# Altium PCB main-board.PcbDoc
Units mm, origin at the board's own origin, x right, y up, seen from the top; angles counter-clockwise.
Board outline 70 x 100 mm, 2 copper layers (Top Layer, Bottom Layer); 74 components, 49 nets, 338 pads, 78 vias.
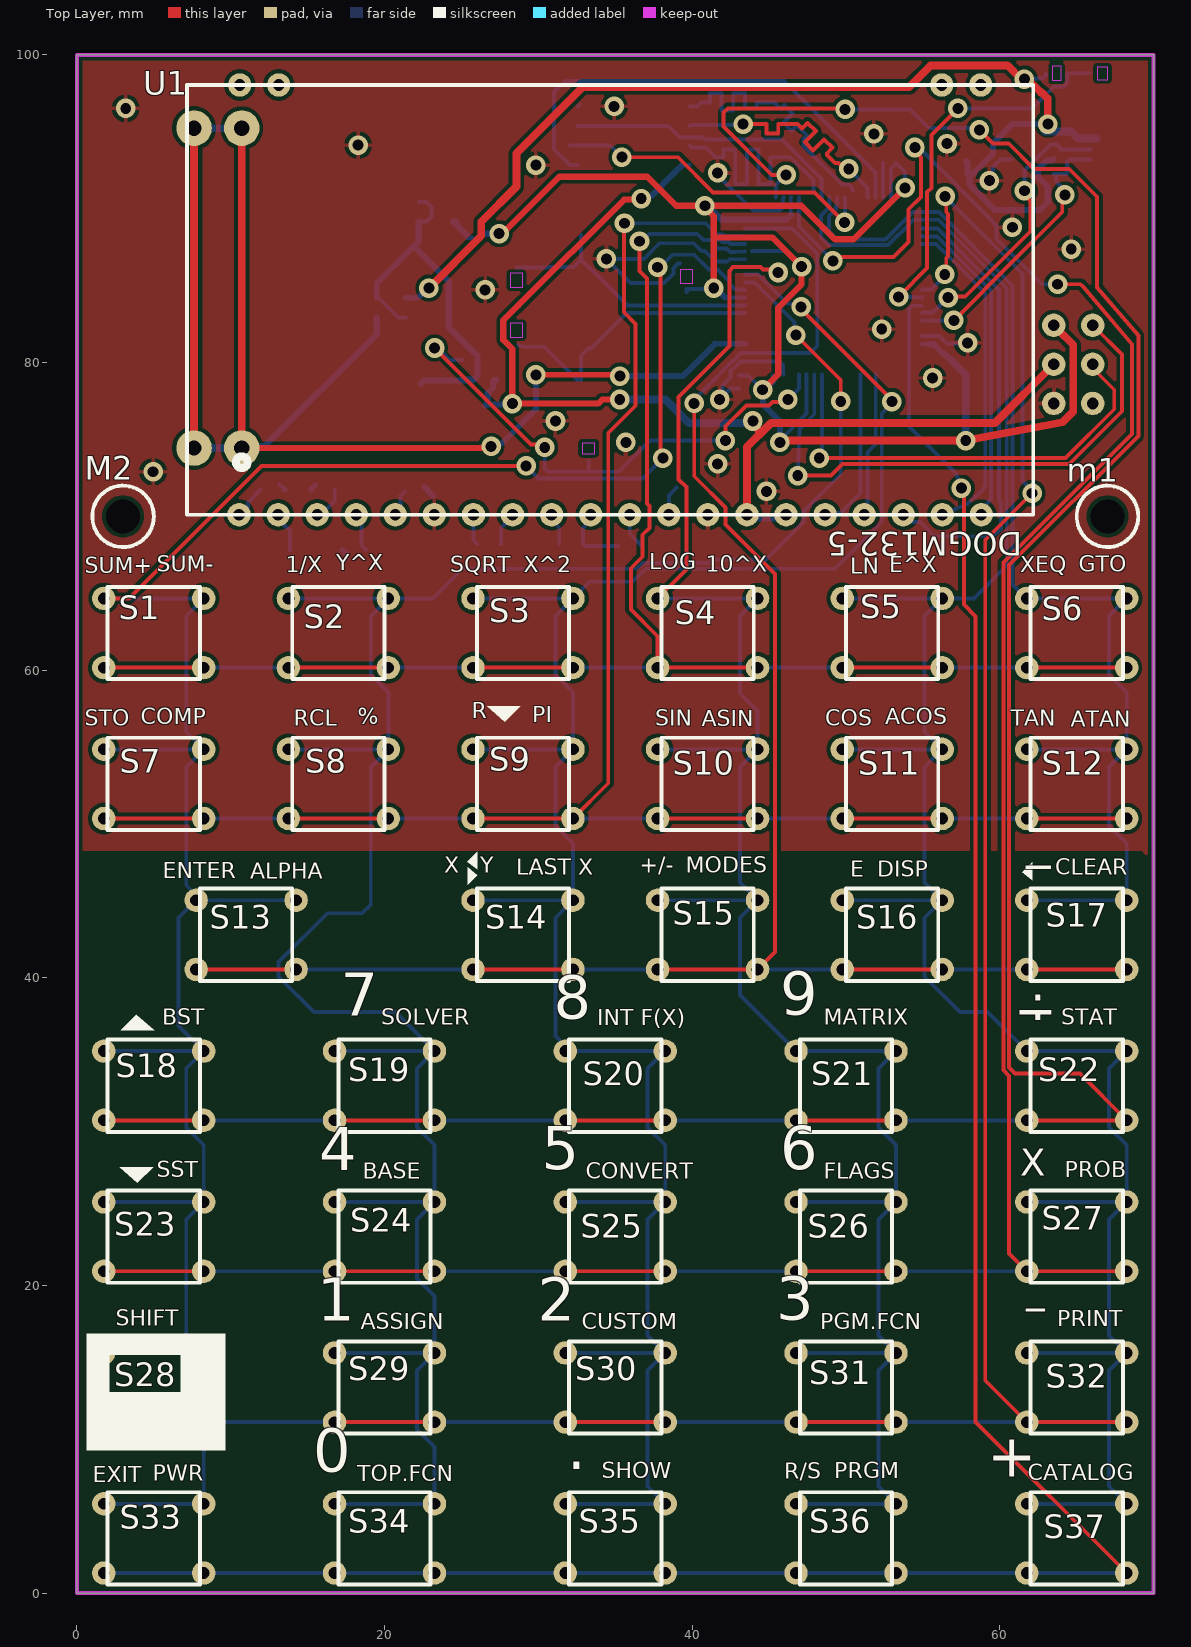
[diagram p0: Top Layer view]
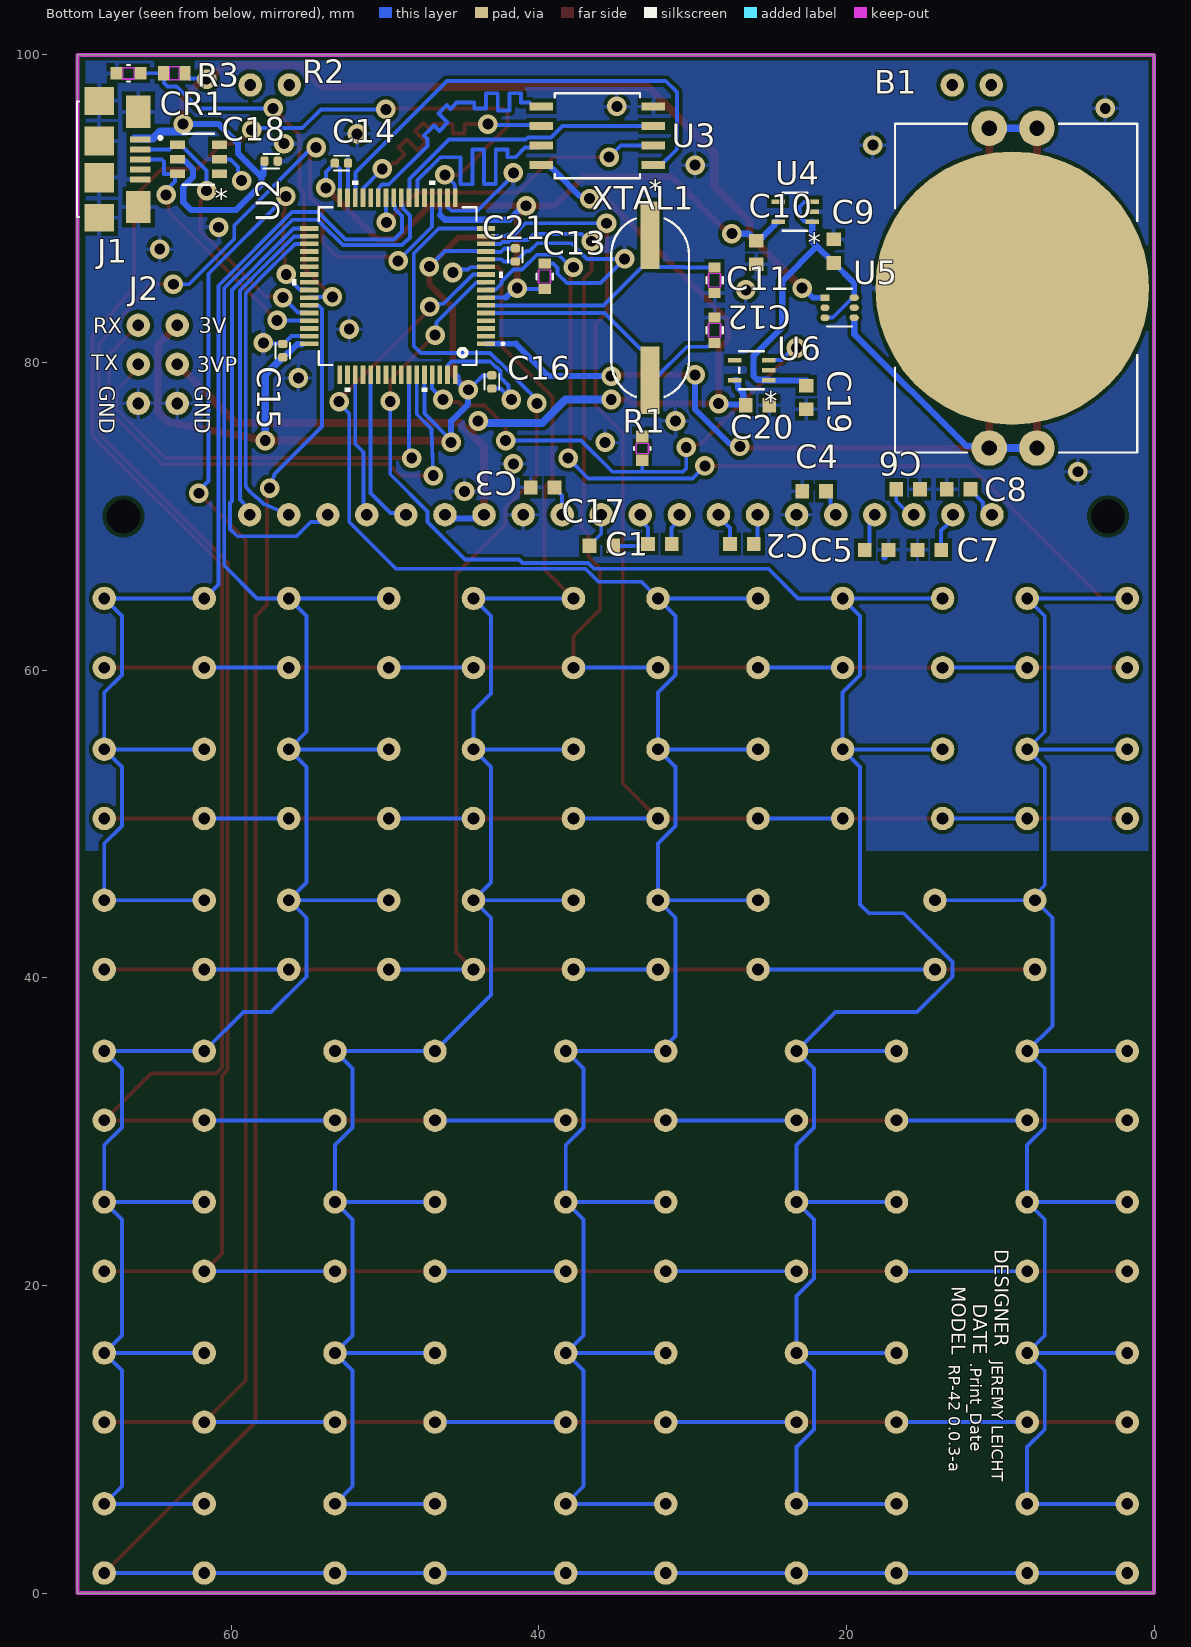
[diagram p1: Bottom Layer view, seen from below]

## Layer stack, top to bottom
Top Solder: solder mask 0.0102, Solder Resist, Dk 3.5
Top Layer: signal copper 0.0356
Dielectric 1: dielectric 0.32, FR-4, Dk 4.8
Bottom Layer: signal copper 0.0356
Bottom Solder: solder mask 0.0102, Solder Resist, Dk 3.5

## Board outline
0,0 70,0 70,100 0,100

## Design rules (kind name [scope] priority, off if disabled: settings)
Clearance [All] p1: gap=0.254 ignorepadtopadclearanceinfootprint=FALSE except(0.127: Arc-Arc Arc-Track Arc-SMDPad Track-Track Track-SMDPad SMDPad-SMDPad)
MatchedLengths [All] p1: tolerance=2.54 checknetsindiffpair=FALSE checkdiffpairvsdiffpair=TRUE checkxsignals=TRUE checkothers=TRUE
MinimumSolderMaskSliver [All] p1 off: minsoldermaskwidth=0.254
PolygonConnect [All] p1: connectstyle=Relief reliefconductorwidth=0.254 reliefentries=4 polygonreliefangle="90 Angle" airgapwidth=0.254
RoutingVias [All] p1: holewidth=0.711 width=1.27 viastyle="Through Hole" minholewidth=0.711 minwidth=1.27 maxholewidth=0.711 maxwidth=1.27
SilkToSilkClearance [All] p1 off: silktosilkclearance=0.254
SilkToSolderMaskClearance [IsPad] p1 off: minsilkscreentomaskgap=0.254 clearancetoexposedcopper=TRUE
SolderMaskExpansion [All] p1: expansion=0.102 istentingtop=FALSE
SupplyNets "Schematic Supply Nets_1" [InNet('3-5V')] p1: voltage=0.000
SupplyNets "Schematic Supply Nets_2" [InNet('3V PERPH')] p2: voltage=0.000
SupplyNets "Schematic Supply Nets_6" [InNet('3V')] p3: voltage=0.000
SupplyNets "Schematic Supply Nets_5" [InNet('5V USB')] p4: voltage=0.000
SupplyNets "Schematic Supply Nets_4" [InNet('GND')] p5: voltage=0.000
SupplyNets "Schematic Supply Nets" [InNet('VBAT')] p6: voltage=0.000
Width [All] p1: maxlimit=0.508 minlimit=0.254 preferedwidth=0.254 minimp=50.000000 maximp=50.000000 favimp=50.000000
27 further rules are at their usual default settings.

## Classes and differential pairs
net class ROW[0..6]: ROW0 ROW1 ROW2 ROW3 ROW4 ROW5 ROW6
net class COL[0..5]: COL0 COL1 COL2 COL3 COL4 COL5
component class screen: C1 C2 C3 C4 C5 C6 C7 C8 C17 U1
component class PSU: B1 C9 C10 C19 C20 R1 U4 U5 U6
component class mcu: C11 C12 C13 C14 C15 C16 C21 J2 R2 R3 U2 X1 X2 XTAL1
component class main-board: C18 CR1 J1 m1 m2 U3
component class keyboard: S1 S2 S3 S4 S5 S6 S7 S8 S9 S10 S11 S12 S13 S14 S15 S16 S17 S18 S19 S20 S21 S22 S23 S24 S25 S26 S27 S28 S29 S30 S31 S32 S33 S34 S35 S36 S37

## Components (designator, comment, footprint, x,y, rotation, side; value= is the part's Value field where it differs from the comment)
B1 "BAT-HLD-001-THM" BAT-HLD-001-THM_TEC 10.72,74.436 r90 bottom
C1 "1uF" CAPC1608X90N 32.131,68.199 r0 bottom
C2 "1uF" CAPC1608X90N 26.797,68.199 r0 bottom
C3 "1uF" CAPC1608X90N 39.751,71.882 r0 bottom
C4 "1uF" CAPC1608X90N 22.098,71.628 r0 bottom
C5 "1uF" CAPC1608X90N 18.034,67.818 r180 bottom
C6 "1uF" CAPC1608X90N 15.994,71.755 r180 bottom
C7 "1uF" CAPC1608X90N 14.613,67.818 r0 bottom
C8 "1uF" CAPC1608X90N 12.708,71.755 r0 bottom
C9 "1uF" CAPC1608X90N 20.828,87.241 r270 bottom
C10 "1uF" CAPC1608X90N 25.861,87.155 r90 bottom
C11 "20pF" CAP_CL10_SAM 28.575,85.344 r90 bottom
C12 "20pF" CAP_CL10_SAM 28.575,82.103 r270 bottom
C13 "100nF" CAPC1005X55N 41.529,86.995 r90 bottom
C14 "100nF" CAPC1005X55N 52.832,92.964 r0 bottom
C15 "100nF" CAPC1005X55N 56.642,80.772 r270 bottom
C16 "100nF" CAPC1005X55N 43.053,78.74 r90 bottom
C17 "1uF" CAPC1608X90N 35.941,68.08 r0 bottom
C18 "100nF" CAPC1005X55N 57.404,93.091 r180 bottom
C19 "1uF" CAPC1608X90N 22.606,77.724 r90 bottom
C20 "1uF" CAPC1608X90N 25.781,77.216 r0 bottom
C21 "10uF" CAP_CL10_SAM 39.624,85.598 r90 bottom
CR1 "USBLC6-4SC6" SOT23-6L_STM 62.135,93.218 r0 bottom
J1 "10118192-0002LF" AMPHENOL_10118192-0002LF 65.905,93.208 r270 bottom
J2 "bypass_conn" bypass_conn 66.04,82.423 r270 bottom
m1 "m2" m2 67,70 r0 top
M2 "m2" m2 3,70 r0 top (schematic designator m2)
R1 "100K" RC0603N_YAG 33.274,74.422 r270 bottom
R2 "33K" STA_RMCF0603_STP 63.691,98.806 r0 bottom
R3 "82K" RC0603N_YAG 66.675,98.806 r180 bottom
S1 "temp_switch" PCBComponent_1 5,62.416 r180 top
S2 "temp_switch" PCBComponent_1 17,62.416 r180 top
S3 "temp_switch" PCBComponent_1 29,62.416 r180 top
S4 "temp_switch" PCBComponent_1 41,62.416 r180 top
S5 "temp_switch" PCBComponent_1 53,62.416 r180 top
S6 "temp_switch" PCBComponent_1 65,62.416 r180 top
S7 "temp_switch" PCBComponent_1 5,52.606 r180 top
S8 "temp_switch" PCBComponent_1 17,52.606 r180 top
S9 "temp_switch" PCBComponent_1 29,52.606 r180 top
S10 "temp_switch" PCBComponent_1 41,52.606 r180 top
S11 "temp_switch" PCBComponent_1 53,52.606 r180 top
S12 "temp_switch" PCBComponent_1 65,52.606 r180 top
S13 "temp_switch" PCBComponent_1 11,42.796 r180 top
S14 "temp_switch" PCBComponent_1 29,42.796 r180 top
S15 "temp_switch" PCBComponent_1 41,42.796 r180 top
S16 "temp_switch" PCBComponent_1 53,42.796 r180 top
S17 "temp_switch" PCBComponent_1 65,42.796 r180 top
S18 "temp_switch" PCBComponent_1 5,32.986 r180 top
S19 "temp_switch" PCBComponent_1 20,32.986 r180 top
S20 "temp_switch" PCBComponent_1 35,32.986 r180 top
S21 "temp_switch" PCBComponent_1 50,32.986 r180 top
S22 "temp_switch" PCBComponent_1 65,32.986 r180 top
S23 "temp_switch" PCBComponent_1 5,23.176 r180 top
S24 "temp_switch" PCBComponent_1 20,23.176 r180 top
S25 "temp_switch" PCBComponent_1 35,23.176 r180 top
S26 "temp_switch" PCBComponent_1 50,23.176 r180 top
S27 "temp_switch" PCBComponent_1 65,23.176 r180 top
S28 "temp_switch" PCBComponent_1 5,13.366 r180 top
S29 "temp_switch" PCBComponent_1 20,13.366 r180 top
S30 "temp_switch" PCBComponent_1 35,13.366 r180 top
S31 "temp_switch" PCBComponent_1 50,13.366 r180 top
S32 "temp_switch" PCBComponent_1 65,13.366 r180 top
S33 "temp_switch" PCBComponent_1 5,3.556 r180 top
S34 "temp_switch" PCBComponent_1 20,3.556 r180 top
S35 "temp_switch" PCBComponent_1 35,3.556 r180 top
S36 "temp_switch" PCBComponent_1 50,3.556 r180 top
S37 "temp_switch" PCBComponent_1 65,3.556 r180 top
U1 "INTERFACE" INTERFACE 34.671,84.074 r180 top
U2 "STM32L475RCT3" LQFP64-10x10mm 49.184,84.967 r0 bottom
U3 "W25Q64JVSSIQ" SOIC-8_5P28X5P28_WIN 36.195,94.742 r0 bottom
U4 "MIC5365-3.0YC5-TR" SC-70_C5_MCH 23.336,89.804 r0 bottom
U5 "BAT54DW-7-F" SOT-363_DIO 20.447,83.566 r180 bottom
U6 "MIC5365-3.0YC5-TR" SC-70_C5_MCH 26.162,79.502 r0 bottom
XTAL1 "J49SMH-A-G-G-K-8M0" XTAL_J49SMH-A-G-G-K-8M0_JAU 32.766,83.566 r90 bottom

## Footprints (in the part's own frame and the unit in brackets; to place one, negate y for a bottom-side part, rotate by r counter-clockwise, add the part's x,y. Pads: shape width x height; smd on the part's side, far side on the other; paste and mask are expansions set on the pad)
AMPHENOL_10118192-0002LF [mm]
  rect 0.4x1.35 smd: 1(-1.3,0) 2(-0.65,0) 3(0,0) 4(0.65,0) 5(1.3,0)
  rect 2.1x1.6 smd: S1(-3.1,-0.125) S2(3.1,-0.125)
  rect 1.8x1.9 smd: S3(-3.8,-2.675) S6(3.8,-2.675)
  rect 1.9x1.9 smd: S4(-1.2,-2.675) S5(1.2,-2.675)
  silkscreen extent -3.75,-4.12 3.75,1.4, body extent -3.95,-4.82 3.95,0.28, height 2.7
BAT-HLD-001-THM_TEC [mil]
  round 91 / inner round 60 / far side round 91 hole 39 paste-99999 mask+0: 1(0,0) 2(0,-122.05) 3(818.9,0) 4(818.9,-122.05)
  round 700 smd paste-350 mask-350: 5(409.45,-59.06)
  silkscreen extent -11,-379 830,241
bypass_conn [mil]
  round 60 hole 30: 1(0,100) 2(100,100) 3(200,100) 4(0,0) 5(100,0) 6(200,0)
CAP_CL10_SAM [mm]
  rect 0.656x0.8 smd paste+0 mask+0: 1(-0.828,0) 2(0.828,0)
  Top Layer keep-out region: -0.449,-0.349 -0.449,0.349 0.449,0.349 0.449,-0.349
  Keep-Out Layer region: -0.449,-0.4 -0.449,0.4 0.449,0.4 0.449,-0.4
  silkscreen extent -0.19,-0.53 0.19,0.53, body extent -0.8,-0.4 0.8,0.4, height 0.9
CAPC1005X55N [mm]
  rrect53% 0.54x0.6 smd: 1(-0.43,0) 2(0.43,0)
  silkscreen extent -0.5,-0.48 0.5,0.48
CAPC1608X90N [mm]
  rect 0.89x0.93 smd: 1(-0.77,0) 2(0.77,0)
INTERFACE [mil]
  round 60 hole 30: 1(-948.23,-550) 2(-848.23,-550) 19(848.23,-550) 20(948.23,-550) 21(950,550) 22(850,550) 23(750,550) 24(650,550) 25(550,550) 26(450,550) 27(350,550) 28(250,550) 29(150,550) 30(50,550) 31(-50,550) 32(-150,550) 33(-250,550) 34(-350,550) 35(-450,550) 36(-550,550) 37(-650,550) 38(-750,550) 39(-850,550) 40(-950,550)
  silkscreen extent -1083,-550 1083,550
LQFP64-10x10mm [mil]
  rect 47x12 smd paste+0 mask+0: 1(-226.38,147.64) 2(-226.38,127.95) 3(-226.38,108.27) 4(-226.38,88.58) 5(-226.38,68.9) 6(-226.38,49.21) 7(-226.38,29.53) 8(-226.38,9.84) 9(-226.38,-9.84) 10(-226.38,-29.53) 11(-226.38,-49.21) 12(-226.38,-68.9) 13(-226.38,-88.58) 14(-226.38,-108.27) 15(-226.38,-127.95) 16(-226.38,-147.64) 33(226.38,-147.64) 34(226.38,-127.95) 35(226.38,-108.27) 36(226.38,-88.58) 37(226.38,-68.9) 38(226.38,-49.21) 39(226.38,-29.53) 40(226.38,-9.84) 41(226.38,9.84) 42(226.38,29.53) 43(226.38,49.21) 44(226.38,68.9) 45(226.38,88.58) 46(226.38,108.27) 47(226.38,127.95) 48(226.38,147.64)
  rect 12x47 smd paste+0 mask+0: 17(-147.64,-226.38) 18(-127.95,-226.38) 19(-108.27,-226.38) 20(-88.58,-226.38) 21(-68.9,-226.38) 22(-49.21,-226.38) 23(-29.53,-226.38) 24(-9.84,-226.38) 25(9.84,-226.38) 26(29.53,-226.38) 27(49.21,-226.38) 28(68.9,-226.38) 29(88.58,-226.38) 30(108.27,-226.38) 31(127.95,-226.38) 32(147.64,-226.38) 49(147.64,226.38) 50(127.95,226.38) 51(108.27,226.38) 52(88.58,226.38) 53(68.9,226.38) 54(49.21,226.38) 55(29.53,226.38) 56(9.84,226.38) 57(-9.84,226.38) 58(-29.53,226.38) 59(-49.21,226.38) 60(-68.9,226.38) 61(-88.58,226.38) 62(-108.27,226.38) 63(-127.95,226.38) 64(-147.64,226.38)
  silkscreen extent -273,-270 270,270, body extent -236,-236 236,236, height 63
m2 [mm]
  silkscreen extent -2,-2 2,2
PCBComponent_1 [mil]
  round 60 hole 30: 1(-127.95,88.58) 1(127.95,88.58) 2(-127.95,-88.58) 2(127.95,-88.58)
  silkscreen extent -118,-118 118,118
RC0603N_YAG [mil]
  rect 30x32 smd paste+0 mask+0: 1(-30.5,0) 2(30.5,0)
  Top Layer keep-out region: -13.5,-14 -13.5,14 13.5,14 13.5,-14
  Keep-Out Layer region: -13.5,-16 -13.5,16 13.5,16 13.5,-16
  silkscreen extent -3,-21 3,21, body extent -31,-16 31,16, height 28
SC-70_C5_MCH [mil]
  rect 34.5x12 smd paste+0 mask+0: 1(-43.75,25.59) 2(-43.75,0) 3(-43.75,-25.59) 4(43.75,-25.59) 5(43.75,25.59)
  silkscreen extent -32,-48 32,49, body extent -47,-44 47,44, height 43
SOIC-8_5P28X5P28_WIN [mil]
  rect 60x21 smd paste+0 mask+0: 1(-143.5,75) 2(-143.5,25) 3(-143.5,-25) 4(-143.5,-75) 5(143.5,-75) 6(143.5,-25) 7(143.5,25) 8(143.5,75)
  silkscreen extent -109,-109 109,109, body extent -159,-104 159,104, height 85
SOT23-6L_STM [mil]
  rect 38.5x22 smd paste+0 mask+0: 1(-53.75,37.4) 2(-53.75,0) 3(-53.75,-37.4) 4(53.75,-37.4) 5(53.75,0) 6(53.75,37.4)
  silkscreen extent -40,-65 40,65, body extent -59,-60 59,60, height 57
SOT-363_DIO [mm]
  rect 0.6x0.42 smd paste+0 mask+0: 1(-0.95,0.65)
  oval 0.6x0.42 smd paste+0 mask+0: 2(-0.95,0) 3(-0.95,-0.65) 4(0.95,-0.65) 5(0.95,0) 6(0.95,0.65)
  silkscreen extent -0.8,-1.23 0.8,1.23, body extent -0.9,-1.1 0.9,1.1, height 1
STA_RMCF0603_STP [mil]
  rect 28x37 smd paste+0 mask+0: 1(-27.5,0) 2(27.5,0)
  Top Layer keep-out region: -11.5,-16.5 -11.5,16.5 11.5,16.5 11.5,-16.5
  Keep-Out Layer region: -11.5,-18.5 -11.5,18.5 11.5,18.5 11.5,-18.5
  body extent -34,-19 34,19, height 22
XTAL_J49SMH-A-G-G-K-8M0_JAU [mil]
  rect 173x48 smd paste+0 mask+0: 1(-185.5,0) 2(185.5,0)
  silkscreen extent -228,-100 228,100, body extent -252,-94 252,94, height 159

## Part data
B1: "CR2032 Battery holder. 2.7V-3V.  /  / https://www.digikey.com/en/products/detail/te-connectivity-linx/BAT-HLD-001-THM/3044009", Mfr_Name="TE Connectivity", Supplier Part Number 1=BAT-HLD-001-THM-ND, RefDes=RefDes, Supplier 1=Digikey, Type=Type
C1 C2 C3 C4 C5 C6 C7 C8 C17 C20: library part CL10B105KP8NNNC, "CL10B105KP8NNNC", Package=None, Availability=Unavailable, MP=CL10B105KP8NNNC, Price=None
  C20: Supplier 1=Avnet, Supplier Part Number 1=CL10B105KP8NNNC
C9 C19: library part CL10B105KP8NNNC, "CL10B105KP8NNNC. / https://www.digikey.com/en/products/detail/samsung-electro-mechanics/CL10B105KP8NNNC/3887604?s=N4IgTCBcDaIMIBkCMAGAQqgrAaQAoA4A5YuEAXQF8g", Package=None, Availability=Unavailable, MP=CL10B105KP8NNNC, Price=None, Supplier 1=Avnet, Supplier Part Number 1=CL10B105KP8NNNC
C10: library part CL10B105KP8NNNC, "CL10B105KP8NNNC / https://www.digikey.com/en/products/detail/samsung-electro-mechanics/CL10B105KP8NNNC/3887604?s=N4IgTCBcDaIMIBkCMAGAQqgrAaQAoA4A5YuEAXQF8g", Package=None, Availability=Unavailable, MP=CL10B105KP8NNNC, Price=None, Supplier 1=Avnet, Supplier Part Number 1=CL10B105KP8NNNC
C11 C12: library part CL10C200JB8NNNC, "CL10C200JB8NNNC", Mfr_Name=Samsung
C13 C14 C15 C16 C18: library part CL05B104KP5NNNC, "0.1ÂµF Â±10% 10V Ceramic Capacitor X7R 0402 _1005 Metric_", Package="0402 Samsung", Availability=Unavailable, MF="Samsung Electro-Mechanics", MP=CL05B104KP5NNNC, Price=None, SnapEDA_Link=https://www.snapeda.com/parts/CL05B104KP5NNNC/Samsung%20Electro-Mechanics/view-part/1365387/?ref=snap
C21: library part CL10A106KQ8NNNL, "CL10A106KQ8NNNL", Mfr_Name=Samsung
CR1: "No Description Available", Mfr_Name=STMicroelectronics, RefDes=RefDes, Type=Type
J1: "Micro USB 2.0, Input Output Connectors, B TYPE RECEPTACLE without flange", Package=None, Check_prices=https://www.snapeda.com/parts/10118192-0002LF/Amphenol+FCI/view-part/?ref=eda, MF="Amphenol ICC", MP=10118192-0002LF, SnapEDA_Link=https://www.snapeda.com/parts/10118192-0002LF/Amphenol+FCI/view-part/?ref=snap
J2: "Bypass connector for power supply and backup chip programming"
R1: library part RC0603FR-07100KL, "RC0603FR-07100KL", Mfr_Name=Yageo
R2: library part RMCF0603FT33K0, "RMCF0603FT33K0", Mfr_Name="Stackpole International"
R3: library part RC0603FR-0782KL, "RC0603FR-0782KL", Mfr_Name=Yageo
U2: "STM32 - 256KB, 128KB RAM, USB OTG, QUAD SPI /  / https://www.st.com/en/microcontrollers-microprocessors/stm32l475rc.html#overview", Mfr_Name=STMicroelectronics, RefDes=RefDes, Type=Type
U3: "W25Q64JVSSIQ. 64MBit Quad-SPI flash", Mfr_Name=Winbond, RefDes=RefDes, Type=Type
U4 U6: "3V Linear Voltage Regulator. / https://www.digikey.com/en/products/detail/microchip-technology/MIC5365-3-0YC5-TR/1868092?s=N4IgTCBcDaILIEkDCBWAzANhQWjQOgAYBNVbAFQCUQBdAXyA", Mfr_Name=Microchip, Supplier Part Number 1=55AC2794, RefDes=RefDes, Supplier 1=Newark, Type=Type
U5: "2 Diode Array, 30V@100mA, Surface mount. Schottky. 6-TSSOP. / https://www.diodes.com/assets/Datasheets/BAT54DW.pdf", Mfr_Name="Diodes Inc", RefDes=RefDes, Supplier 1="Arrow Electronics", Supplier Part Number 1=BAT54DW-7-F, Type=Type
XTAL1: "No Description Available", Mfr_Name=Jauch

## Via types
v1: diameter 1.27, hole 0.711, Top Layer to Bottom Layer, 76 vias
v2: diameter 0/0 (per signal layer), hole 2.2, Top Layer to Bottom Layer, 2 vias

## Nets (pads, with @x,y where several pads share a name; then routed paths per layer and width w, separated by ;. In a path a pad name is that pad's centre, name@x,y a point inside that pad or via, vN(x,y) a via of type N, cw(c..) or ccw(c..) an arc to the next point about the centre after c; other vN are vias at no path point)
3-5V: C9.2 C19.2 U4.1 U4.3 U5.3 U5.6 U6.1 | length 25.5
  Bottom Layer w0.254: U5.6 19.593,84.216 20.893,82.916 U5.3 ; C9.2@20.808,86.471 C9.2 ; U4.1 22.25,89.179 22.73,89.179 23.044,89.494 23.044,90.114 22.73,90.429 22.25,90.429 U4.3 ; U6.1 U6.1@25.076,78.877
  Bottom Layer w0.381: U5.6 19.497,85.16 C9.2@20.808,86.471
  Bottom Layer w0.4: C9.2 21.915,87.558 ; U4.1 22.225,87.868 21.915,87.558 ; C19.2@22.352,78.613 22.578,78.839 U6.1@25.434,78.839 ; U6.1@25.076,78.877 25.791,78.877 26.035,79.121 26.035,80.44 24.178,82.297 24.178,85.296 21.916,87.558
3V: C10.2 C13.2 C14.2 C15.2 C16.2 C21.1 J2.1 U2.7 U2.13 U2.19 U2.32 U2.48 U2.60 U2.64 U4.5 | length 122.2
  Top Layer w0.254: v1(27.449,88.375) v1@27.669,88.375 ; v1(40.83,90.193) v1@41.105,90.193 ; v1@46.923,86.427 v1(47.117,86.233) ; J2.1 J2.1@63.754,82.169
  Top Layer w0.4: v1@27.669,88.375 31.369,92.075 37.084,92.075 38.966,90.193 v1(40.83,90.193) ; v1@40.894,90.022 41.402,89.514 41.402,88.138 ; v1@41.105,90.193 47.094,90.193 49.276,88.011 50.498,88.011 v1(53.84,91.353) ; v1(41.402,84.836) 41.402,88.138 ; v1(44.577,78.232) 45.593,79.248 45.593,83.566 47.117,85.09 v1(47.117,86.233) ; v1@46.923,86.427 45.212,88.138 41.402,88.138
  Top Layer w0.508: v1(45.707,74.805) 45.84,74.938 57.777,74.938 v1(57.785,74.93) 64.076,76.123 64.77,76.817 64.77,81.153 J2.1@63.754,82.169
  Bottom Layer w0.254: C10.2@25.47,88.132 25.655,88.132 C10.2@25.903,87.884 ; C21.1@39.624,84.768 39.624,84.582 39.81,84.768 41.334,84.768 v1(41.402,84.836) ; v1(40.83,90.193) v1@40.998,90.193 ; C13.2 42.241,87.425 42.475,87.192 42.763,87.192 42.964,87.199 U2.13 ; 42.148,84.217 U2.7 ; C16.2 43.639,79.17 44.261,78.548 v1@44.597,78.499 ; U2.13@43.878,87.217 43.904,87.242 46.108,87.242 v1(47.117,86.233) ; v1(45.707,74.805) 45.707,74.947 47.434,76.675 U2.60 ; 46.409,89.589 46.409,90.692 U2.19 ; U2.32 52.934,92.597 53.262,92.925 C14.2@53.262,92.943 ; C14.2 C14.2@53.262,92.943 ; v1(53.84,91.353) 53.84,92.386 53.425,92.801 53.404,92.801 C14.2@53.262,92.943 ; U2.48 55.353,81.217 55.379,81.192 U2.48@55.379,81.188 ; C15.2 56.663,80.342 56.805,80.2 C15.2@56.805,80.179
  Bottom Layer w0.4: U4.5 24.638,89.154 24.686,89.106 24.686,88.916 C10.2@25.47,88.132 ; C10.2 25.881,87.925 26.331,88.375 v1(27.449,88.375) ; v1@40.998,90.193 41.91,89.281 46.101,89.281 46.409,89.589 ; 41.91,84.455 42.148,84.217 ; v1(44.577,78.232) 44.594,78.215 44.594,77.303 45.707,76.191 v1@45.707,74.947 ; v1@44.577,78.36 44.834,78.36 45.294,78.82 U2.64@45.294,79.077 ; v1@44.933,78.353 44.979,78.398 v1@44.986,78.398 ; U2.48@55.379,81.188 55.707,81.188 56.29,80.605 56.349,80.605 56.542,80.412 56.572,80.412 C15.2
  Bottom Layer w0.508: C15.2@56.805,80.179 57.785,79.199 v1(57.785,74.93)
"3V PERPH": C20.2 J2.2 U1.34 U1.35 U3.8 U6.5 | length 73
  Top Layer w0.254: v1(28.307,77.329) v1@28.307,77.492 ; U1.34@42.974,69.864 43.153,70.042 U1.34@43.249,70.138 ; 44.323,75.276 44.323,75.438
  Top Layer w0.381: v1(28.307,77.329) 28.501,77.523 28.695,77.329 33.889,77.329 34.158,77.597 v1(35.293,77.597)
  Top Layer w0.4: v1@28.307,77.492 28.307,80.88 27.721,81.466 27.721,82.74 28.708,83.727 35.578,90.598 36.638,90.598 v1(36.691,90.65)
  Top Layer w0.508: U1.34 43.561,74.514 44.149,75.102 44.404,75.357 45.12,76.073 59.69,76.073 J2.2 ; v1(43.942,76.2) 43.942,75.994 44.323,75.613 44.323,75.438
  Bottom Layer w0.254: U3.8@39.345,92.837 U3.8
  Bottom Layer w0.381: C20.2 26.607,77.272 28.25,77.272 v1(28.307,77.329)
  Bottom Layer w0.4: C20.2 26.709,77.374 26.709,78.017 27.055,78.363 27.055,78.804 27.103,78.852 U6.5 ; v1(36.691,90.65) 36.857,90.817 37.324,90.817 38.866,92.359 U3.8@39.345,92.837 ; U1.34@43.89,69.85 U1.35@46.43,69.85
  Bottom Layer w0.508: v1(35.293,77.597) 38.261,77.597 39.786,76.073 43.815,76.073 v1(43.942,76.2)
"5V USB": C18.1 CR1.5 J1.1 R2.1 U5.1 | length 75.8
  Top Layer w0.508: v1(22.886,84.836) 26.289,88.239 26.289,89.154 28.575,91.44 28.575,93.599 32.893,97.917 54.102,97.917 55.499,99.314 60.508,99.314 61.397,98.425 61.801,98.425 62.665,97.561 62.713,97.561 63.119,97.155 v1(63.119,95.504)
  Bottom Layer w0.254: v1(61.595,98.425) 61.633,98.463 62.763,98.463 62.992,98.692 R2.1 ; v1@63.017,95.606 v1(63.119,95.504)
  Bottom Layer w0.381: U5.1 22.17,84.216 22.79,84.836 v1(22.886,84.836)
  Bottom Layer w0.4: C18.1 57.904,93.021 57.904,92.21 58.039,92.075 ; v1(63.119,95.504) 60.809,95.504 59.563,94.258 59.563,93.599 58.039,92.075 ; CR1.5 63.421,93.139 63.04,93.139 62.484,92.583 62.484,92.052 63.119,91.417 63.119,90.424 62.611,89.916 59.69,89.916 58.039,91.567 58.039,92.075
  Bottom Layer w0.508: v1@62.928,95.016 64.633,95.016 64.899,94.75 65.087,94.562 J1.1@66.294,94.562
C1N: C1.2 C17.1 U1.30 | length 4.4
  Bottom Layer w0.254: U1.30 33.401,69.76 32.901,69.26 C1.2 33.028,68.072 35.163,68.072 C17.1
C1P: C1.1 U1.29 | length 2.1
  Bottom Layer w0.254: U1.29 30.861,69.76 31.361,69.26 C1.1
C2N: C2.1 U1.27 | length 2
  Bottom Layer w0.254: U1.27 25.781,68.445 C2.1
C2P: C2.2 U1.28 | length 2.2
  Bottom Layer w0.254: C2.2 27.567,69.242 28.321,69.996 U1.28
C3P: C17.2 U1.31 | length 2.3
  Bottom Layer w0.254: U1.31 35.941,68.87 36.711,68.1 C17.2
COL0: S1.2 S7.2 S13.2 S18.2 S23.2 S28.2 S33.2 U2.8 | length 170.4
  Top Layer w0.254: S1.2@1.75,64.666 3.386,64.666 11.999,73.279 v1(29.21,73.279) ; v1(37.759,86.193) 37.929,86.023 37.929,73.958 v1(38.1,73.787)
  Bottom Layer w0.254: S33.2@1.75,5.806 8.25,5.806 8.25,9.5 7.107,10.643 7.107,14.473 S28.2@8.25,15.616 ; S28.2@1.75,15.616 S28.2@8.25,15.616 ; S23.2@1.75,25.426 S23.2@8.25,25.426 ; S18.2@1.75,35.236 S18.2@8.25,35.236 ; S7.2@1.75,54.856 S7.2@8.25,54.856 ; S1.2@1.75,64.666 8.25,64.666 7.107,63.523 7.107,55.999 S7.2@8.25,54.856 ; S13.2@14.25,45.046 S13.2@7.75,45.046 ; v1(29.21,73.279) 30.015,72.474 36.787,72.474 v1(38.1,73.787) ; v1(37.759,86.193) 37.911,86.193 38.726,87.008 40.129,87.008 41.096,86.041 41.634,86.041 42.418,85.257 42.418,85.124 42.8,84.742 43.409,84.742 U2.8 ; S13.2@7.75,45.046 6.607,43.903 6.607,36.879 S18.2@8.25,35.236 ; S13.2@7.75,45.046 7.75,45.376 7.107,46.019 7.107,53.713 S7.2@8.25,54.856 ; S28.2@8.25,15.616 7.107,16.759 7.107,24.283 S23.2@8.25,25.426 ; S23.2@8.25,25.426 8.25,29.12 7.107,30.263 7.107,34.093 S18.2@8.25,35.236
COL1: S2.2 S8.2 S19.2 S24.2 S29.2 S34.2 U2.9 | length 161.8
  Top Layer w0.254: v1(46.736,81.788) 49.657,78.867 v1(49.657,77.47)
  Bottom Layer w0.254: S8.2@13.75,54.856 S8.2@20.25,54.856 ; S2.2@13.75,64.666 S2.2@20.25,64.666 ; S34.2@16.75,5.806 23.25,5.806 23.25,9.5 22.107,10.643 22.107,14.473 S29.2@23.25,15.616 ; S29.2@16.75,15.616 S29.2@23.25,15.616 ; S24.2@16.75,25.426 S24.2@23.25,25.426 ; S19.2@16.75,35.236 S19.2@23.25,35.236 ; U2.9 43.459,85.192 44.068,85.192 46.639,82.62 46.639,81.885 v1(46.736,81.788) ; v1(49.657,77.47) 49.657,72.736 47.244,70.323 47.244,69.631 44.796,67.183 41.275,67.183 41.064,66.972 36.795,66.972 36.414,66.591 25.066,66.591 23.141,64.666 S2.2@20.25,64.666 ; S8.2@20.25,54.856 19.107,53.713 19.107,44.761 18.542,44.196 16.284,44.196 13.107,41.019 13.107,40.073 15.404,37.776 20.71,37.776 S19.2@23.25,35.236 ; S8.2@20.25,54.856 20.25,58.55 19.107,59.693 19.107,63.523 S2.2@20.25,64.666 ; S29.2@23.25,15.616 23.25,19.31 22.107,20.453 22.107,24.283 S24.2@23.25,25.426 ; S24.2@23.25,25.426 23.25,29.12 22.107,30.263 22.107,34.093 S19.2@23.25,35.236
COL2: S3.2 S9.2 S14.2 S20.2 S25.2 S30.2 S35.2 U2.10 | length 153.6
  Top Layer w0.254: v1(47.08,83.616) 47.08,83.483 52.839,77.724 52.959,77.724 v1@52.959,77.089
  Bottom Layer w0.254: S14.2@25.75,45.046 S14.2@32.25,45.046 ; S9.2@25.75,54.856 S9.2@32.25,54.856 ; S3.2@25.75,64.666 S3.2@32.25,64.666 ; S35.2@31.75,5.806 38.25,5.806 37.107,6.949 37.107,14.473 S30.2@38.25,15.616 ; S30.2@31.75,15.616 S30.2@38.25,15.616 ; S25.2@31.75,25.426 S25.2@38.25,25.426 ; U2.10 44.291,85.717 46.188,83.82 46.423,83.82 46.433,83.811 46.886,83.811 v1(47.08,83.616) ; v1(52.984,77.46) 52.984,77.343 52.324,76.683 52.324,69.631 49.284,66.591 36.953,66.591 36.112,65.75 33.334,65.75 S3.2@32.25,64.666 ; S14.2@32.25,45.046 31.107,43.903 31.107,36.209 31.75,35.566 31.75,35.236 38.25,35.236 37.107,34.093 37.107,30.263 38.25,29.12 S25.2@38.25,25.426 ; S14.2@32.25,45.046 32.25,48.74 31.107,49.883 31.107,53.713 S9.2@32.25,54.856 ; S9.2@32.25,54.856 32.25,58.55 31.107,59.693 31.107,63.523 S3.2@32.25,64.666 ; S30.2@38.25,15.616 37.107,16.759 37.107,24.283 S25.2@38.25,25.426
COL3: S4.2 S10.2 S15.2 S21.2 S26.2 S31.2 S36.2 U2.11 | length 141.1
  Top Layer w0.254: S4.2@37.306,64.222 39.624,66.54 39.624,71.898 39.116,72.406 39.116,77.764 42.418,81.066 42.418,85.957 42.662,86.201 44.45,86.201 44.605,86.046 45.399,86.046 v1(45.593,85.852)
  Bottom Layer w0.254: S15.2@37.75,45.046 S15.2@44.25,45.046 ; S10.2@37.75,54.856 S10.2@44.25,54.856 ; S4.2@37.75,64.666 44.25,64.666 43.107,63.523 43.107,58.491 44.25,57.348 S10.2@44.25,54.856 ; U2.11 43.459,86.192 44.45,86.192 44.595,86.046 45.399,86.046 v1(45.593,85.852) ; S36.2@46.75,5.806 53.25,5.806 52.107,6.949 52.107,14.473 S31.2@53.25,15.616 ; S31.2@46.75,15.616 S31.2@53.25,15.616 ; S26.2@46.75,25.426 S26.2@53.25,25.426 ; S15.2@44.25,45.046 43.107,43.903 43.107,38.879 46.75,35.236 53.25,35.236 52.107,34.093 52.107,30.263 53.25,29.12 S26.2@53.25,25.426 ; S15.2@44.25,45.046 43.107,46.189 43.107,53.713 S10.2@44.25,54.856 ; S31.2@53.25,15.616 52.107,16.759 52.107,24.283 S26.2@53.25,25.426
COL4: S5.2 S11.2 S16.2 S22.2 S27.2 S32.2 S37.2 U2.24 | length 154.1
  Bottom Layer w0.254: U2.24 48.934,90.273 48.84,90.179 48.84,90.015 48.387,89.562 48.387,88.129 48.886,87.63 52.739,87.63 54.083,88.975 54.232,89.123 54.39,89.281 56.005,89.281 60.452,84.834 60.452,66.802 58.316,64.666 S5.2@56.25,64.666 ; S16.2@49.75,45.046 S16.2@56.25,45.046 ; S11.2@49.75,54.856 S11.2@56.25,54.856 ; S5.2@49.75,64.666 S5.2@56.25,64.666 ; S37.2@61.75,5.806 68.25,5.806 67.107,6.949 67.107,14.473 S32.2@68.25,15.616 ; S32.2@61.75,15.616 S32.2@68.25,15.616 ; S27.2@61.75,25.426 S27.2@68.25,25.426 ; S16.2@56.25,45.046 55.107,43.903 55.107,40.073 57.404,37.776 59.21,37.776 61.75,35.236 68.25,35.236 67.107,34.093 67.107,30.263 68.25,29.12 S27.2@68.25,25.426 ; S16.2@56.25,45.046 55.107,46.189 55.107,53.713 S11.2@56.25,54.856 ; S11.2@56.25,54.856 55.107,55.999 55.107,63.523 S5.2@56.25,64.666 ; S32.2@68.25,15.616 67.107,16.759 67.107,24.283 S27.2@68.25,25.426
COL5: S6.2 S12.2 S17.2 U2.25 | length 79
  Bottom Layer w0.254: U2.25 49.434,90.273 49.34,90.179 49.34,89.976 48.895,89.531 48.895,88.519 49.403,88.011 52.581,88.011 54.359,89.789 56.036,89.789 60.833,84.992 60.833,65.583 61.75,64.666 68.25,64.666 67.107,63.523 67.107,59.693 68.25,58.55 S12.2@68.25,54.856 ; S17.2@61.75,45.046 68.25,45.046 68.25,48.74 67.107,49.883 67.107,53.713 S12.2@68.25,54.856 ; S12.2@61.75,54.856 S12.2@68.25,54.856
D+: CR1.6 J1.3 U2.45 | length 17.5
  Top Layer w0.254: v1(57.016,82.745) 60.902,86.632 63.277,89.007 64.061,89.79 64.061,90.275
  Bottom Layer w0.254: U2.45 54.948,82.731 57.002,82.731 v1(57.016,82.745) ; v1(64.227,90.897) 64.227,91.172 63.642,91.756 63.642,92.126 CR1.6 63.71,92.268 64.37,92.268 64.37,93.059 64.519,93.208 J1.3
D-: CR1.4 J1.2 U2.44 | length 18.5
  Top Layer w0.254: v1(56.64,84.222) 56.712,84.294 57.751,84.294 61.991,88.534 61.991,90.512 61.602,90.9 v1(61.602,91.169)
  Bottom Layer w0.254: U2.44 54.959,83.242 55.66,83.242 v1(56.64,84.222) ; v1(61.602,91.169) 61.602,92.48 63.29,94.168 63.71,94.168 64.02,93.858 J1.2
FLASH_CLK: U2.29 U3.6 | length 18.4
  Top Layer w0.254: v1(43.307,95.504) 43.942,95.504 44.831,95.504 44.831,94.876 45.593,94.876 45.593,95.504 46.479,95.504 46.863,95.504 47.053,95.313 47.143,95.224 47.503,95.583 48.041,95.044 47.323,94.326 47.862,93.787 48.58,94.505 49.119,93.966 48.76,93.607 48.76,93.488 49.283,92.964 49.523,92.964 49.903,92.584 v1(50.178,92.584)
  Bottom Layer w0.254: U3.6 39.903,95.441 43.243,95.441 v1(43.307,95.504) ; v1(50.178,92.584) 51.409,91.353 51.409,90.742 U2.29
FLASH_IO0: U2.27 U3.5 | length 19.8
  Bottom Layer w0.254: U3.5 40.335,96.647 40.589,96.901 41.021,96.901 41.148,96.901 41.148,97.506 41.91,97.506 41.91,96.393 42.672,96.393 42.672,97.506 43.434,97.506 43.434,96.52 44.196,96.52 44.196,96.901 45.021,96.901 45.339,96.901 45.657,96.584 45.746,96.494 45.987,96.734 46.525,96.195 45.926,95.596 46.465,95.057 46.824,95.416 47.015,95.225 47.482,94.758 47.244,94.521 47.244,94.081 49.757,91.568 50.192,91.568 50.409,91.351 50.409,91.187 50.429,91.166 U2.27@50.434,91.166
FLASH_IO1: U2.26 U3.2 | length 21.6
  Top Layer w0.254: v1(35.433,93.348) 39.073,93.348 41.362,91.059 47.962,91.059 v1(49.911,89.11)
  Bottom Layer w0.254: U3.2@32.055,94.107 U3.2 34.671,94.107 v1@35.433,93.345 ; U2.26@49.909,90.742 49.923,90.729 49.923,89.121 v1(49.911,89.11)
FLASH_IO2: U2.23 U3.3 | length 18.5
  Bottom Layer w0.254: U3.3 33.528,95.377 35.644,95.377 38.452,95.377 39.201,94.628 40.707,94.628 40.847,94.488 45.847,94.488 48.409,91.926 48.409,90.742 U2.23
FLASH_IO3: U2.22 U3.7 | length 18.7
  Bottom Layer w0.254: U3.7 39.967,93.98 40.894,93.98 41.529,93.345 41.91,93.345 42.037,93.345 42.037,93.853 42.799,93.853 42.799,91.598 43.561,91.598 43.561,93.853 44.323,93.853 44.323,91.588 45.085,91.588 45.085,93.345 45.72,93.345 46.396,93.345 47.879,91.862 U2.22@47.879,91.186
FLASH_NCS: U2.30 U3.1 | length 31
  Bottom Layer w0.254: U3.1 32.055,92.837 31.026,93.866 31.026,97.574 31.75,98.298 45.974,98.298 51.909,92.363 51.909,90.742 U2.30
GND: B1.5 C3.2 C4.2 C5.2 C6.2 C7.2 C8.2 C9.1 C10.1 C11.1 C12.1 C13.1 C14.1 C15.1 C16.1 C18.2 C19.1 C20.1 C21.2 CR1.2 J1.5 J1.S1 J1.S2 J1.S3 J1.S4 J1.S5 J1.S6 J2.3 J2.6 R1.1 R3.1 U1.26 U1.33 U2.12 U2.18 U2.31 U2.47 U2.63 U3.4 U4.2 U6.2 | length 41.6
  Top Layer w0.254: U1.26 U1.26@23.46,70.323
  Bottom Layer w0.254: C8.2@13.182,72.071 C8.2@13.478,71.775 ; v1@18.288,93.904 v1@18.288,94.361 ; U1.26 23.484,69.861 U1.26@23.484,69.764 ; U3.4 U3.4@32.69,96.787 ; 39.224,86.428 39.066,86.428 38.775,86.137 38.775,85.772 38.18,85.177 35.981,85.177 v1(34.417,86.741) 36.87,86.741 37.886,87.757 40.092,87.757 40.6,87.249 40.815,87.249 41.499,86.565 C13.1 42.269,86.565 42.421,86.717 U2.12 ; v1(41.656,92.329) 41.656,92.202 43.992,89.866 45.692,89.866 45.909,90.083 45.909,90.692 U2.18 ; v1(41.783,77.597) v1@41.977,77.791 ; C16.1 42.496,78.31 v1@41.977,77.791 ; U2.63 45.909,79.242 45.909,79.851 45.692,80.068 43.154,80.068 42.781,79.694 42.732,79.694 42.499,79.461 42.499,79.025 41.977,78.503 v1@41.977,77.791 ; C14.1 52.418,92.948 52.418,90.733 U2.31 ; U2.47 56.088,81.717 56.603,81.202 C15.1 56.681,81.241 57.873,81.241 v1(57.912,81.28) ; v1(59.325,91.821) 59.325,92.096 59.563,92.334 59.563,92.71 60.048,93.195 60.747,93.195 CR1.2
  Bottom Layer w0.381: C8.2@13.478,71.775 C8.2@13.498,71.755 ; C6.2 C6.2@15.479,72.01 ; C5.2 17.518,67.563 17.518,67.318 ; C4.2@22.594,71.903 22.614,71.903 C4.2@22.868,71.648 ; C4.2@22.867,71.609 23.122,71.353 C4.2@23.14,71.353
  other v1: 44.831,71.628 4.953,72.898 41.656,73.406 35.687,74.803 31.115,76.2 55.626,78.994 52.324,82.169 26.54,84.726 64.643,87.376 60.813,88.793 29.845,92.837 18.288,94.132 56.566,94.234 51.816,94.869 3.175,96.52 34.925,96.647
LCD_A0: U1.38 U2.33 | length 29
  Bottom Layer w0.254: U1.38@54.05,69.85 54.269,69.631 54.829,69.631 55.753,68.707 59.603,68.707 60.071,69.175 60.071,70.866 59.944,70.993 59.944,84.709 58.198,86.455 58.198,86.467 57.156,87.508 57.145,87.508 55.936,88.717 U2.33
LCD_CS: U1.40 U2.34 | length 20.9
  Bottom Layer w0.254: U2.34 54.959,88.192 55.923,88.192 56.987,87.127 56.999,87.127 57.817,86.309 57.817,86.297 59.436,84.678 59.436,71.083 59.044,70.691 U1.40@59.044,69.936
LCD_RES: U1.39 U2.35 | length 21.4
  Bottom Layer w0.254: U2.35 55.858,87.717 56.829,86.746 56.841,86.746 57.436,86.151 57.436,86.139 59.055,84.52 59.055,71.969 58.812,71.639 58.724,71.551 58.165,71.054 ccw(c58.801,70.104) 57.906,70.815 U1.39
LCD_SCL: U1.37 U2.51 | length 9.6
  Bottom Layer w0.254: U1.37@51.51,69.85 51.409,69.951 51.409,74.17 51.934,74.695 U2.51
LCD_SI: U1.36 U2.53 | length 10.6
  Bottom Layer w0.254: U1.36 48.746,70.209 49.635,70.209 50.934,71.508 U2.53
NetC11_2: C11.2 U2.6 XTAL1.2 | length 17.8
  Bottom Layer w0.254: C11.2@28.575,86.174 30.549,86.174 30.582,86.208 32.283,86.208 32.766,86.69 XTAL1.2 ; XTAL1.2@32.846,86.61 33.249,86.208 33.299,86.208 35.79,83.717 U2.6
NetC12_2: C12.2 U2.5 XTAL1.1 | length 18.2
  Bottom Layer w0.254: C12.2@28.702,81.153 28.78,81.075 28.951,81.075 28.997,81.028 30.363,81.028 XTAL1.1@32.537,78.854 ; XTAL1.1 32.766,80.442 33.249,80.924 33.426,80.924 35.719,83.217 U2.5
PWR_PERPH: R1.2 U2.61 U6.3 | length 33.8
  Top Layer w0.254: v1(23.253,80.945) 29.518,74.68 30.222,74.68 v1(30.416,74.485) ; v1@42.164,75.184 42.164,75.859 43.521,77.216 44.998,77.216 45.212,77.43 46.061,77.43 v1(46.228,77.597)
  Bottom Layer w0.254: v1(23.253,80.945) 23.438,80.945 24.232,80.152 U6.3 ; v1(30.416,74.485) 30.416,73.11 30.629,72.898 33.274,72.898 ; R1.2 33.274,72.898 ; v1(42.164,74.93) 37.251,74.93 35.219,72.898 33.274,72.898 ; v1@46.482,77.851 46.934,78.303 U2.61
ROW0: S1.1 S2.1 S3.1 S4.1 S5.1 S6.1 U2.14 | length 103
  Top Layer w0.254: S1.1@1.75,60.166 S1.1@8.25,60.166 ; S2.1@13.75,60.166 S2.1@20.25,60.166 ; S3.1@25.75,60.166 S3.1@32.25,60.166 ; v1(36.576,87.884) 36.576,85.939 37.066,85.45 37.066,70.822 37.214,70.674 37.214,69.253 36.767,68.805 36.767,67.373 36.017,66.624 36.017,63.94 37.75,62.207 37.75,60.166 S4.1@44.25,60.166 ; S5.1@49.75,60.166 S5.1@56.25,60.166 ; S6.1@61.75,60.166 S6.1@68.25,60.166
  Bottom Layer w0.254: S1.1@8.25,60.166 S2.1@13.75,60.166 ; S2.1@20.25,60.166 S3.1@25.75,60.166 ; S3.1@32.25,60.166 S4.1@37.75,60.166 ; v1(36.576,87.884) 36.757,87.884 37.233,88.36 40.331,88.36 40.736,87.955 41.844,87.955 41.963,87.836 42.369,87.836 42.488,87.717 U2.14 ; S4.1@44.25,60.166 S5.1@49.75,60.166 ; S5.1@56.25,60.166 S6.1@61.75,60.166
ROW1: S7.1 S8.1 S9.1 S10.1 S11.1 S12.1 U2.15 | length 115.4
  Top Layer w0.254: S7.1@1.75,50.356 S7.1@8.25,50.356 ; S8.1@13.75,50.356 S8.1@20.25,50.356 ; S9.1@25.75,50.356 32.25,50.356 34.544,52.65 34.544,75.411 36.322,77.189 36.322,82.506 35.56,83.268 35.56,89.014 v1(35.6,89.055) ; S10.1@37.75,50.356 S10.1@44.25,50.356 ; S11.1@49.75,50.356 S11.1@56.25,50.356 ; S12.1@61.75,50.356 S12.1@68.25,50.356
  Bottom Layer w0.254: S7.1@8.25,50.356 S8.1@13.75,50.356 ; S8.1@20.25,50.356 S9.1@25.75,50.356 ; S9.1@32.25,50.356 S10.1@37.75,50.356 ; v1(35.6,89.055) 40.866,89.055 41.585,88.336 42.002,88.336 42.121,88.217 U2.15 ; S10.1@44.25,50.356 S11.1@49.75,50.356 ; S11.1@56.25,50.356 S12.1@61.75,50.356
ROW2: S13.1 S14.1 S15.1 S16.1 S17.1 U2.16 | length 121.1
  Top Layer w0.254: S13.1@7.75,40.546 S13.1@14.25,40.546 ; S14.1@25.75,40.546 S14.1@32.25,40.546 ; S15.1@37.75,40.546 44.25,40.546 45.393,41.689 45.393,66.24 42.164,69.469 42.164,70.577 40.132,72.609 v1(40.132,77.343) ; S16.1@49.75,40.546 S16.1@56.25,40.546 ; S17.1@61.75,40.546 S17.1@68.25,40.546
  Bottom Layer w0.254: S13.1@14.25,40.546 S14.1@25.75,40.546 ; S14.1@32.25,40.546 S15.1@37.75,40.546 ; v1(40.132,77.343) 40.132,77.584 41.148,78.6 42.118,79.57 42.118,79.619 42.574,80.075 42.623,80.075 43.166,80.618 47.671,80.618 48.133,81.08 48.133,87.091 46.507,88.717 U2.16 ; S15.1@44.25,40.546 S16.1@49.75,40.546 ; S16.1@56.25,40.546 S17.1@61.75,40.546
ROW3: S18.1 S19.1 S20.1 S21.1 S22.1 U2.17 | length 171.5
  Top Layer w0.254: S18.1@1.75,30.736 S18.1@8.25,30.736 ; S19.1@16.75,30.736 S19.1@23.25,30.736 ; S20.1@31.75,30.736 S20.1@38.25,30.736 ; v1(46.101,92.203) 45.171,92.203 42.037,95.337 42.037,96.244 42.313,96.52 49.888,96.52 v1(49.949,96.459) ; S21.1@46.75,30.736 S21.1@53.25,30.736 ; v1(58.674,95.123) 59.563,94.234 60.579,94.234 62.23,92.583 64.516,92.583 66.255,90.844 66.33,90.769 66.33,84.879 69.014,81.751 69.014,75.237 60.607,66.83 60.607,34.163 60.988,33.782 65.204,33.782 68.25,30.736 S22.1@61.75,30.736
  Bottom Layer w0.254: S18.1@8.25,30.736 S19.1@16.75,30.736 ; S19.1@23.25,30.736 S20.1@31.75,30.736 ; S20.1@38.25,30.736 S21.1@46.75,30.736 ; U2.17 45.459,90.742 45.459,91.424 45.466,91.431 45.466,91.567 v1(46.101,92.203) ; v1(49.949,96.459) 54.168,96.459 55.378,95.25 58.547,95.25 v1(58.674,95.123) ; S21.1@53.25,30.736 S22.1@61.75,30.736
ROW4: S23.1 S24.1 S25.1 S26.1 S27.1 U2.20 | length 167.7
  Top Layer w0.254: S23.1@1.75,20.926 S23.1@8.25,20.926 ; S24.1@16.75,20.926 S24.1@23.25,20.926 ; S25.1@31.75,20.926 S25.1@38.25,20.926 ; S26.1@46.75,20.926 S26.1@53.25,20.926 ; v1@49.403,86.868 53.086,86.868 54.063,87.845 54.063,89.965 54.864,90.765 54.864,91.257 54.872,91.265 54.872,93.323 54.483,93.712 v1(54.483,93.98) ; v1(63.754,85.09) 65.252,85.09 65.416,84.929 65.425,84.921 68.58,81.19 68.58,75.342 68.549,75.311 60.226,66.988 60.226,34.005 60.607,33.624 60.607,22.069 61.75,20.926 S27.1@68.25,20.926
  Bottom Layer w0.254: S23.1@8.25,20.926 S24.1@16.75,20.926 ; S24.1@23.25,20.926 S25.1@31.75,20.926 ; S25.1@38.25,20.926 S26.1@46.75,20.926 ; U2.20 46.934,88.829 v1(49.149,86.614) ; S26.1@53.25,20.926 S27.1@61.75,20.926 ; v1(54.483,93.98) 54.737,93.98 59.797,88.92 59.797,88.031 62.738,85.09 v1(63.754,85.09)
ROW5: S28.1 S29.1 S30.1 S31.1 S32.1 U2.41 | length 158.3
  Top Layer w0.254: S28.1@1.75,11.116 S28.1@8.25,11.116 ; S29.1@16.75,11.116 S29.1@23.25,11.116 ; S30.1@31.75,11.116 S30.1@38.25,11.116 ; S31.1@46.75,11.116 S31.1@53.25,11.116 ; v1(56.42,85.73) 56.515,85.825 56.515,86.796 56.642,86.923 56.642,89.662 56.515,89.789 56.515,90.728 v1(56.438,90.805) ; v1(62.103,71.501) 59.055,68.453 59.055,13.811 61.75,11.116 S32.1@68.25,11.116
  Bottom Layer w0.254: S28.1@8.25,11.116 S29.1@16.75,11.116 ; S29.1@23.25,11.116 S30.1@31.75,11.116 ; S30.1@38.25,11.116 S31.1@46.75,11.116 ; S31.1@53.25,11.116 S32.1@61.75,11.116 ; U2.41 54.959,84.742 55.568,84.742 56.42,85.594 v1(56.42,85.73) ; v1(56.438,90.805) 61.468,85.775 61.468,72.303 62.103,71.668 v1(62.103,71.501) ; S32.1@68.25,11.116 S32.1@68.367,11.116
ROW6: S33.1 S34.1 S35.1 S36.1 S37.1 U2.43 | length 155.4
  Top Layer w0.254: v1(57.506,71.831) 57.658,71.679 57.658,64.262 58.42,63.5 58.42,11.136 58.494,11.062 S37.1@68.25,1.306
  Bottom Layer w0.254: S33.1@1.75,1.306 8.25,1.306 16.75,1.306 23.25,1.306 31.75,1.306 38.25,1.306 46.75,1.306 53.25,1.306 61.75,1.306 S37.1@68.25,1.306 ; U2.43@54.909,83.692 54.3,83.692 54.083,83.475 54.083,75.838 57.17,72.751 v1(57.506,71.831)
USART_RX: J2.4 U2.59 | length 36.2
  Top Layer w0.254: v1(46.863,72.644) 49.022,72.644 49.784,73.406 64.516,73.406 67.945,76.835 67.945,80.518 J2.4
  Bottom Layer w0.254: v1(46.863,72.644) 46.974,75.676 47.934,76.636 U2.59
USART_TX: J2.5 U2.58 | length 29.5
  Top Layer w0.254: v1(48.26,73.787) 64.262,73.787 67.437,76.962 67.437,78.232 66.04,79.629 J2.5
  Bottom Layer w0.254: v1(48.26,73.787) 48.434,73.961 U2.58
V0: C8.1 U1.21 | length 2.3
  Bottom Layer w0.254: U1.21@10.87,69.85 11.113,70.093 11.113,70.91 11.938,71.735 C8.1
V1: C7.1 U1.22 | length 2.2
  Bottom Layer w0.254: U1.22@13.41,69.85 13.41,69.506 13.843,69.073 C7.1
V2: C6.1 U1.23 | length 2
  Bottom Layer w0.254: U1.23@15.875,70.104 16.764,70.993 C6.1
V3: C5.1 U1.24 | length 2.2
  Bottom Layer w0.254: U1.24@18.49,69.85 18.49,68.132 C5.1
V4: C4.1 U1.25 | length 1.9
  Bottom Layer w0.254: U1.25@21.03,69.85 21.03,71.33 C4.1
VBAT: B1.1 B1.2 B1.3 B1.4 U2.1 U5.4 | length 97.3
  Top Layer w0.254: v1@26.656,74.436 v1@26.67,74.422
  Top Layer w0.381: B1.1 v1@26.656,74.436 ; v1(29.845,79.202) 35.225,79.202 v1(35.306,79.121)
  Top Layer w0.508: B1.2 B1.4 ; B1.1 B1.3
  Bottom Layer w0.381: B1.1 10.865,74.581 12.224,74.581 ; v1(26.924,74.549) 27.094,74.719 27.602,74.719 29.845,76.962 v1(29.845,79.202) ; v1(35.306,79.121) 39.391,79.121 ; 41.487,81.217 U2.1
  Bottom Layer w0.4: 12.224,74.581 19.497,81.854 U5.4
  Bottom Layer w0.406: 39.391,79.121 41.487,81.217
  Bottom Layer w0.508: B1.2 B1.1 ; B1.4 B1.3
VOUT: C3.1 U1.32 | length 2
  Bottom Layer w0.254: U1.32 38.481,71.362 38.981,71.862 C3.1
VSENSE: R2.2 R3.2 U2.42 | length 25.2
  Top Layer w0.254: v1@53.467,84.328 55.275,86.136 55.275,91.079 55.55,91.354 55.55,94.793 v1(57.277,96.52)
  Bottom Layer w0.254: v1(53.416,84.269) 54.387,84.269 54.413,84.242 54.909,84.242 U2.42 ; v1(57.277,96.52) 62.103,96.52 63.538,97.955 64.14,97.955 64.364,98.178 64.364,98.781 R2.2 R3.2@65.849,98.806
pads on no net: CR1.1 CR1.3 J1.4 U1.1 U1.2 U1.19 U1.20 U2.2 U2.3 U2.4 U2.21 U2.28 U2.36 U2.37 U2.38 U2.39 U2.40 U2.46 U2.49 U2.50 U2.52 U2.54 U2.55 U2.56 U2.57 U2.62 U4.4 U5.2 U5.5 U6.4
copper on no net:
  other v2: 3,70 67,70

## Polygon pours and split planes (outlines as drawn)
GND on Top Layer "GND_L01_P000" (solid, remove dead copper, pour order 0): 0.127,99.822 0.254,99.695 69.723,99.695 69.723,47.752 69.215,48.26 0.127,48.26
GND on Bottom Layer "GND_L02_P001" (solid, remove dead copper, pour order 1): 0.381,99.695 69.596,99.695 69.469,99.568 69.469,48.26 0.381,48.26

## Keep-outs
Keep-Out Layer:
  the board outline again, w0.254

## Silkscreen, mask and mechanical layers (free items; w line width, h text height)
Top Overlay:
  rectangle: 0.635,9.271 9.652,10.414
  rectangle: 1.27,9.906 8.509,13.081
  rectangle: 6.731,9.906 9.144,16.002
  rectangle: 1.016,15.494 8.509,16.764
  rectangle: 1.651,16.366 8,16.891
  rectangle: 0.635,9.271 2.032,16.891
  rectangle: 7.874,9.271 9.652,16.891
  region: 25.4,46.038 25.4,47.18 26.035,46.672
  region: 26.014,48.197 26.014,47.054 25.379,47.562
  region: 62.103,47.498 62.103,46.355 61.468,46.863
  region: 26.67,57.658 28.829,57.658 27.813,56.642
  region: 5.016,36.576 2.857,36.576 3.873,37.592
  region: 2.794,27.686 4.953,27.686 3.937,26.67
  text "LOG" at 37.211,66.195 h1.8
  text "Y^X" at 16.864,66.14 h1.8
  text "SUM-" at 5.18,66.041 h1.8
  text "10^X" at 40.867,66.041 h1.8
  text "GTO" at 65.124,66.041 h1.8
  text "1/X" at 13.589,66.016 h1.8
  text "SQRT" at 24.257,66.016 h1.8
  text "X^2" at 29.056,66.013 h1.8
  text "E^X" at 52.805,66.013 h1.8
  text "XEQ" at 61.341,66.016 h1.8
  text "SUM+" at 0.508,65.941 h1.8
  text "LN" at 50.292,65.913 h1.8
  text "R" at 25.654,56.515 h1.8
  text "PI" at 29.591,56.261 h1.8
  text "COMP" at 4.164,56.135 h1.8
  text "%" at 18.261,56.135 h1.8
  text "ACOS" at 52.551,56.135 h1.8
  text "STO" at 0.508,56.035 h1.8
  text "RCL" at 14.097,56.035 h1.8
  text "SIN" at 37.592,56.035 h1.8
  text "COS" at 48.641,56.035 h1.8
  text "TAN" at 60.699,56.041 h1.8
  text "ASIN" at 40.613,56.008 h1.8
  text "ATAN" at 64.616,55.98 h1.8
  text "_" at 61.722,47.01 h4
  text "X   Y" at 23.876,46.482 h1.8
  text "MODES" at 39.597,46.483 h1.8
  text "+/-" at 36.576,46.458 h1.8
  text "LAST X" at 28.548,46.356 h1.8
  text "CLEAR" at 63.6,46.356 h1.8
  text "E" at 50.292,46.228 h1.8
  text "DISP" at 52.043,46.229 h1.8
  text "ENTER" at 5.588,46.101 h1.8
  text "ALPHA" at 11.276,46.074 h1.8
  text "." at 61.976,37.719 h4
  text "_" at 61.341,37.553 h5
  text "9" at 45.72,36.652 h4.8
  text "BST" at 5.561,36.577 h1.8
  text "7" at 17.145,36.576 h4.8
  text "SOLVER" at 19.785,36.577 h1.8
  text "INT F(X)" at 33.832,36.572 h1.8
  text "MATRIX" at 48.564,36.588 h1.8
  text "STAT" at 63.981,36.577 h1.8
  text "." at 61.976,36.449 h4
  text "8" at 30.988,36.398 h4.8
  text "SST" at 5.18,26.671 h1.8
  text "PROB" at 64.235,26.671 h1.8
  text "5" at 30.226,26.619 h4.8
  text "6" at 45.72,26.619 h4.8
  text "BASE" at 18.592,26.584 h1.8
  text "CONVERT" at 33.07,26.584 h1.8
  text "FLAGS" at 48.564,26.584 h1.8
  text "4" at 15.748,26.543 h4.8
  text "X" at 61.341,26.543 h3
  text "SHIFT" at 2.513,17.019 h1.8
  text "PRINT" at 63.727,16.991 h1.8
  text "3" at 45.466,16.84 h4.8
  text "ASSIGN" at 18.465,16.805 h1.8
  text "CUSTOM" at 32.816,16.805 h1.8
  text "PGM.FCN" at 48.31,16.805 h1.8
  text "1" at 15.621,16.764 h4.8
  text "2" at 29.972,16.764 h4.8
  text "-" at 61.468,16.01 h6
  text "." at 31.877,7.112 h4.8
  text "SHOW" at 34.136,7.113 h1.8
  text "PRGM" at 49.249,7.113 h1.8
  text "R/S" at 45.974,7.088 h1.8
  text "CATALOG" at 61.822,6.986 h1.8
  text "PWR" at 4.926,6.958 h1.8
  text "0" at 15.367,6.934 h4.8
  text "TOP.FCN" at 18.211,6.899 h1.8
  text "EXIT" at 1.016,6.858 h1.8
  text "+" at 59.182,6.629 h4.8
Bottom Overlay:
  circle w0.254: c44.958,80.645 r0.254
  text "3V" at 62.103,81.915 h1
  text "RX" at 68.961,81.915 h1
  text "TX" at 69.088,79.502 h1
  text "3VP" at 62.23,79.375 h1
  text "GND" at 62.357,78.486 h1 r90
  text "GND" at 68.58,78.486 h1 r90
  text "DESIGNER" at 10.668,22.352 h1.52 r90
  text "MODEL" at 13.462,19.939 h1.52 r90
  text "DATE" at 12.065,18.796 h1.52 r90
  text "JEREMY LEICHT" at 10.541,15.113 h0.76 r90
  text ".Print_Date" at 11.938,14.986 h0.76 r90
  text "RP-42 0.0.3-a" at 13.335,14.859 h0.76 r90

## Text inside footprints (layer, text, board x,y; h text height)
CR1: Mechanical 13 "*" at 61.322,93.04 h1.27 r180; Bottom Overlay "*" at 60.198,91.836 h1.27 r180
J1: Mechanical 13 "PCB Edge" at 69.705,88.108 h0.41 r90
U1: Top Overlay "DOGM132-5" at 61.468,68.961 h1.52 r180
U3: Mechanical 13 "*" at 33.617,93.447 h1.27 r180; Bottom Overlay "*" at 31.979,92.431 h1.27 r180
U4: Mechanical 13 "*" at 22.6,90.068 h1.27 r180; Bottom Overlay "*" at 21.653,88.976 h1.27 r180
U6: Mechanical 13 "*" at 25.425,79.766 h1.27 r180; Bottom Overlay "*" at 24.479,78.674 h1.27 r180